# Altium PCB PCB1.PcbDoc (part 3 of 4)
Units mm, origin at the board's own origin, x right, y up, seen from the top; angles counter-clockwise.
Board outline 100.03 x 99.98 mm, 4 copper layers (Top Layer, Layer 2, Layer 3, Bottom Layer), stack 0.603 mm thick; 139 components, 135 nets, 1369 pads, 401 vias.
Unrouted connection lines stored in the file: 1.
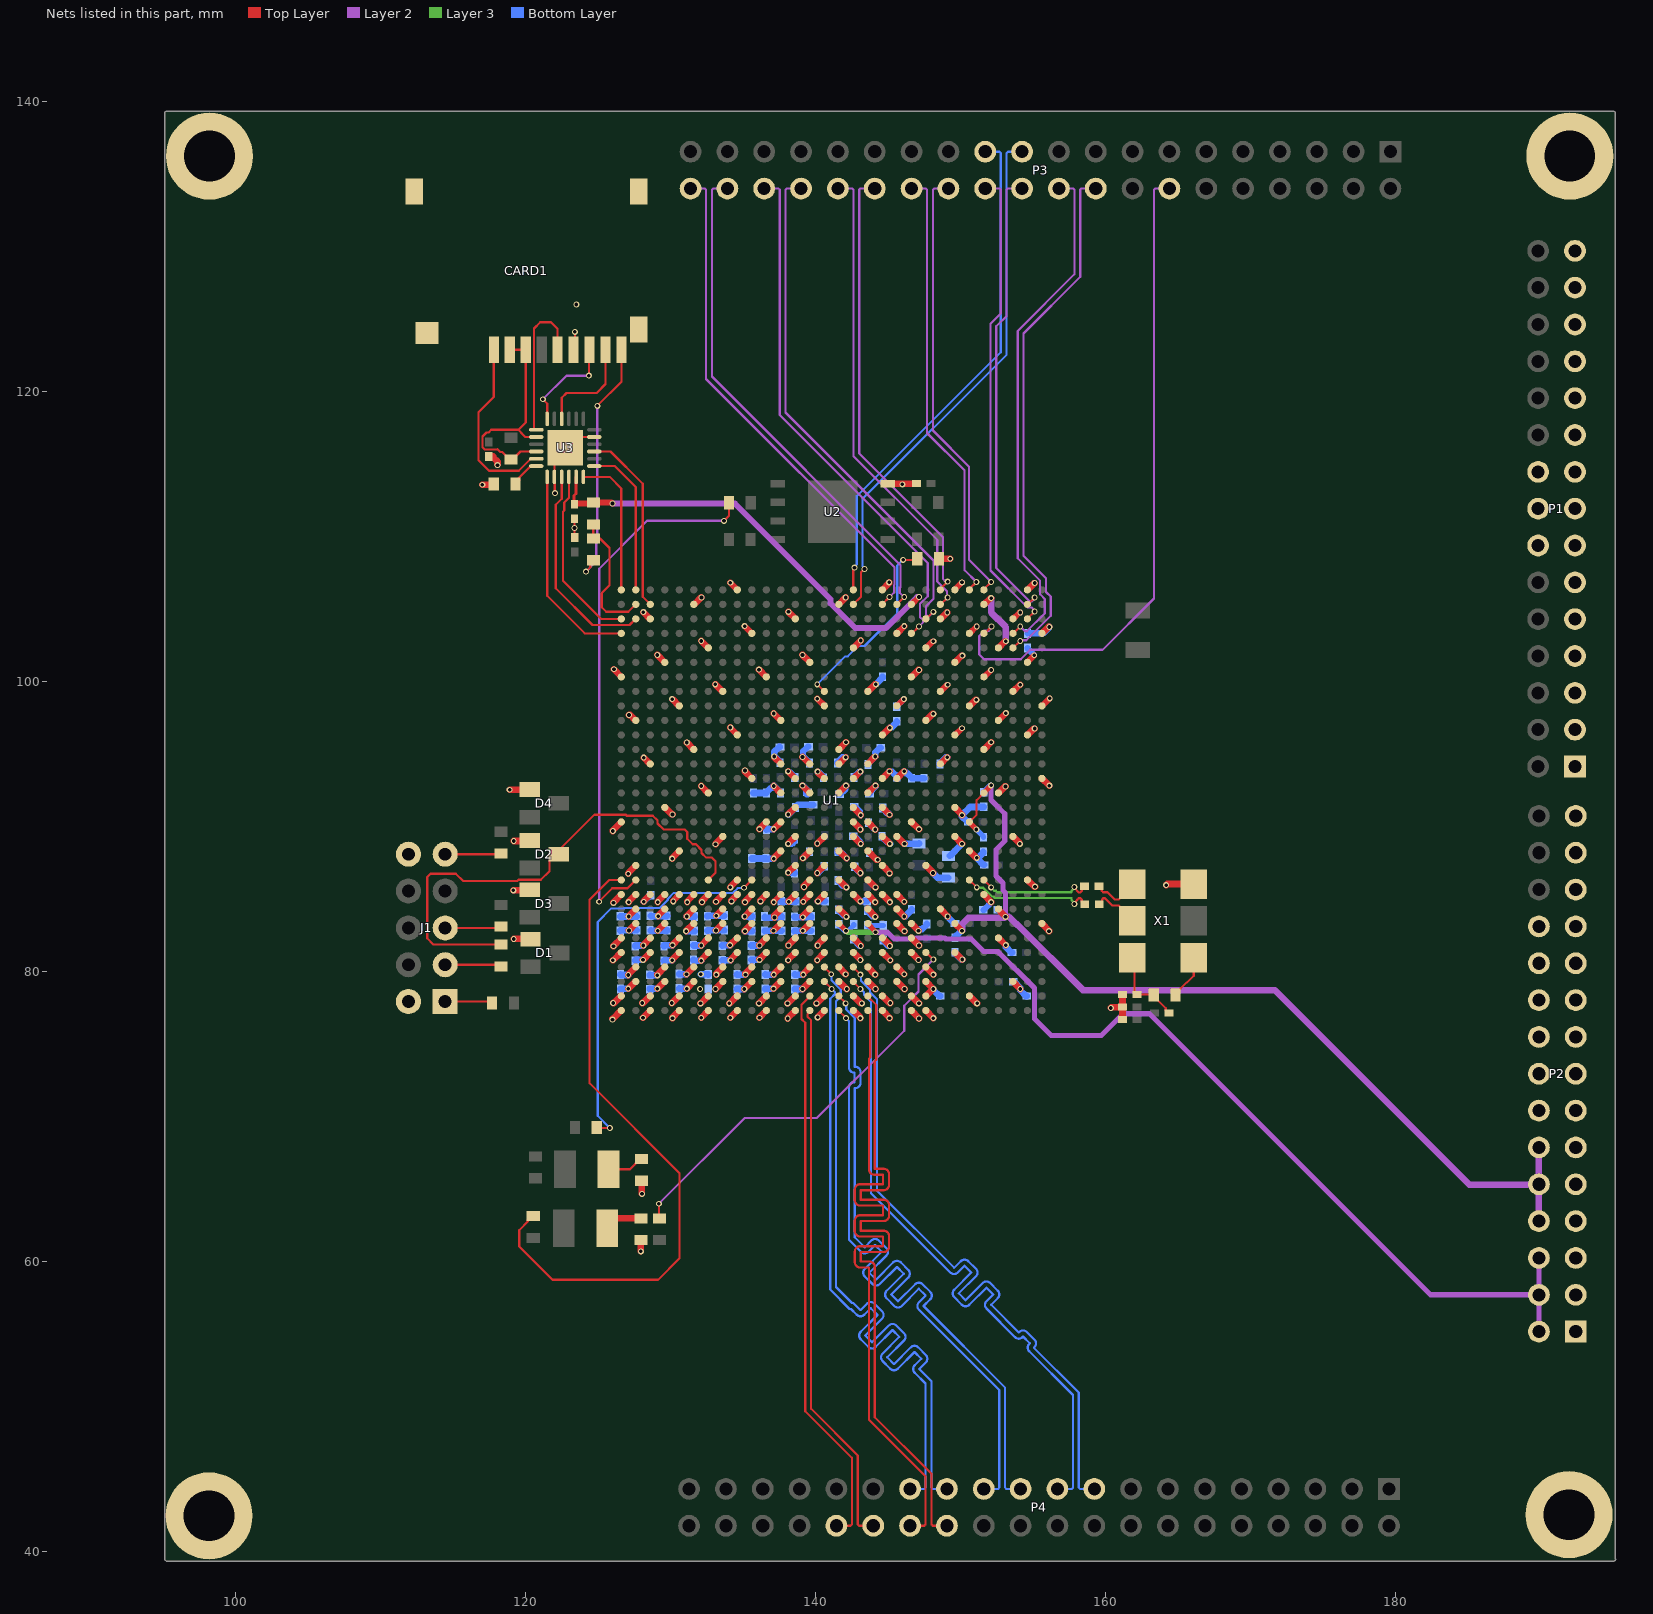
[diagram p5: the nets of this part, all layers, seen from the top]

## Via types
v1: diameter 0.406, hole 0.254, Top Layer to Bottom Layer, 401 vias

## Nets (pads, with @x,y where several pads share a name; then routed paths per layer and width w, separated by ;. In a path a pad name is that pad's centre, name@x,y a point inside that pad or via, vN(x,y) a via of type N, cw(c..) or ccw(c..) an arc to the next point about the centre after c; other vN are vias at no path point) (continued)
GND: C1.2 C2.1 C3.1 C4.1 C5.1 C6.1 C7.1 C8.1 C9.1 C10.1 C11.1 C12.1 C13.2 C14.1 C15.1 C16.1 C17.1 C18.1 C19.1 C20.1 C21.1 C22.1 C23.1 C24.1 C25.1 C26.1 C27.1 C28.1 C29.1 C30.1 C31.1 C32.1 C33.1 C34.1 C35.1 C36.1 C37.1 C38.1 C39.1 C40.1 C41.1 C42.1 C43.1 C44.1 C45.1 C46.1 C47.1 C48.1 C49.1 C50.1 C51.1 C52.1 C53.1 C54.1 C55.1 C56.1 C57.1 C58.1 C59.1 C60.1 C61.1 C62.1 C63.1 C64.1 C65.1 C66.1 C67.1 C68.1 C69.1 C70.1 C71.1 C72.1 C73.1 C76.1 C80.1 C81.1 C82.1 C84.1 C85.1 C86.1 C87.1 C88.1 C89.1 C90.1 C91.1 C92.1 C93.1 C94.2 C95.2 C96.2 C97.1 C98.1 C99.1 CARD1.6 CARD1.10 CARD1.11 CARD1.12 CARD1.13 D1.1 D2.1 D3.1 D4.1 J1.2 J1.10 L1.1 P1.1 P1.2 P1.3 P1.4 P1.5 P1.6 P1.7 P1.8 P1.9 P1.10 P1.11 P1.12 P1.13 P1.14 P1.15 P2.1 P2.2 P2.3 P2.4 P2.5 P2.6 P2.7 P2.8 P2.9 P2.10 P2.11 P2.12 P2.13 P2.14 P2.15 pad.3 R5.1 R7.1 R15.1 R18.1 R19.1 U1.A1 U1.A2 U1.A5 U1.A6 U1.A9 U1.A14 U1.A24 U1.AA1 U1.AA2 U1.AA5 U1.AA6 U1.AA7 U1.AA14 U1.AA24 U1.AB1 U1.AB2 U1.AB3 U1.AB4 U1.AB11 U1.AB21 U1.AC8 U1.AC18 U1.AC28 U1.AD5 U1.AD15 U1.AD25 U1.AE2 U1.AE12 U1.AE22 U1.AF9 U1.AF19 U1.AF29 U1.AG6 U1.AG16 U1.AG26 U1.AH3 U1.AH13 U1.AH23 U1.AJ10 U1.AJ20 U1.AJ30 U1.AK7 U1.AK17 U1.AK27 U1.B4 U1.B8 U1.B9 U1.B11 U1.B21 U1.C1 U1.C2 U1.C6 U1.C9 U1.C18 U1.C28 U1.D4 U1.D8 U1.D9 U1.D15 U1.D25 U1.E1 U1.E2 U1.E6 U1.E9 U1.E12 U1.E22 U1.F4 U1.F8 U1.F9 U1.F19 U1.F29 U1.G1 U1.G2 U1.G6 U1.G9 U1.G16 U1.G26 U1.H4 U1.H8 U1.H9 U1.H13 U1.H23 U1.J1 U1.J2 U1.J6 U1.J9 U1.J10 U1.J20 U1.J30 U1.K4 U1.K8 U1.K9 U1.K17 U1.K27 U1.L1 U1.L2 U1.L6 U1.L9 U1.L14 U1.L24 U1.M4 U1.M8 U1.M9 U1.M12 U1.M14 U1.M16 U1.M18 U1.M21 U1.N1 U1.N2 U1.N6 U1.N9 U1.N11 U1.N13 U1.N15 U1.N17 U1.N28 U1.P4 U1.P8 U1.P9 U1.P10 U1.P12 U1.P16 U1.P18 U1.P25 U1.R1 U1.R2 U1.R6 U1.R9 U1.R11 U1.R13 U1.R17 U1.R22 U1.T4 U1.T8 U1.T10 U1.T12 U1.T16 U1.T18 U1.T19 U1.T29 U1.U1 U1.U2 U1.U6 U1.U9 U1.U11 U1.U13 U1.U14 U1.U15 U1.U17 U1.U26 U1.V4 U1.V8 U1.V9 U1.V10 U1.V12 U1.V14 U1.V16 U1.V18 U1.V23 U1.W1 U1.W2 U1.W6 U1.W9 U1.W11 U1.W13 U1.W15 U1.W17 U1.W20 U1.W30 U1.Y3 U1.Y4 U1.Y7 U1.Y8 U1.Y9 U1.Y17 U1.Y27 U2.4 U3.2 U3.11 U3.25 X1.3 | length 217.3
  Top Layer w0.152: CARD1.10@112.928,124.325 CARD1.10@113.231,124.023 CARD1.10@113.281,124.023 ; v1(122.047,112.979) 122.027,112.999 122.027,114.085 U3.2@122.008,114.103 122.008,115.353 U3.25@122.758,116.103 123.508,116.853 U3.11@124.758,116.853 ; CARD1.6@123.331,122.872 123.419,122.96 v1(123.419,124.104) ; C92.1@123.393,111.209 123.393,109.949 C94.2@123.419,109.923 ; CARD1.11@127.831,124.273 CARD1.11@127.831,124.573 ; U1.F29@131.608,105.314 U1.F29@131.62,105.314 U1.F29@131.645,105.314 ; v1@132.122,105.791 v1(132.148,105.791)
  Top Layer w0.356: v1@137.135,84.817 U1.M9@137.62,85.302
  Top Layer w0.457: v1(117.043,113.563) 117.778,113.563 R19.1@117.824,113.609 ; 117.78,115.51 117.78,115.46 118.085,115.155 v1@118.085,114.935 ; v1(118.923,92.532) 120.3,92.532 D4.1@120.31,92.542 ; v1(119.177,85.598) 120.274,85.598 D3.1@120.31,85.634 ; v1(119.202,82.245) 120.345,82.245 D1.1@120.361,82.23 ; v1(119.202,89.002) 120.274,89.002 D2.1@120.31,89.037 ; v1@125.984,76.733 126.028,76.733 126.608,77.314 U1.A1@126.62,77.314 ; v1(126.035,80.772) 126.067,80.772 126.608,81.314 U1.A5@126.62,81.314 ; v1(126.035,89.687) 126.035,89.717 126.62,90.302 U1.A14@126.62,90.314 ; v1(126.06,77.826) 126.12,77.826 126.608,78.314 U1.A2@126.62,78.314 ; v1(126.086,81.74) 126.086,81.768 U1.A6@126.613,82.296 ; v1(126.086,84.734) 126.086,84.768 126.62,85.302 U1.A9@126.62,85.314 ; v1(126.111,100.838) 126.111,100.835 126.62,100.326 U1.A24@126.62,100.314 ; U1.A6@126.613,82.327 U1.A6@126.613,82.296 ; U1.A6@126.62,82.314 126.62,82.302 U1.A6@126.613,82.296 ; v1(127.102,79.756) 127.102,79.784 127.62,80.302 U1.B4@127.62,80.314 ; v1(127.102,86.741) 127.102,86.784 127.62,87.302 U1.B11@127.62,87.314 ; v1(127.127,83.795) 127.127,83.809 127.62,84.302 U1.B8@127.62,84.314 ; v1(127.127,84.785) 127.127,84.809 127.62,85.302 U1.B9@127.62,85.314 ; v1(127.152,97.688) 127.234,97.688 127.608,97.314 U1.B21@127.62,97.314 ; v1(127.965,60.706) 127.965,61.455 R7.1@127.991,61.48 ; R5.1@128.016,65.569 128.041,65.544 v1(128.041,64.668) ; v1(128.067,77.826) 128.12,77.826 128.608,78.314 U1.C2@128.62,78.314 ; v1(128.118,76.81) U1.C1@128.62,77.314 U1.C1@128.62,77.314 ; v1(128.143,81.791) 128.143,81.825 128.62,82.302 U1.C6@128.62,82.314 ; v1(128.143,104.775) 128.147,104.775 128.608,104.314 U1.C28@128.62,104.314 ; v1(128.168,84.811) 128.168,84.851 128.62,85.302 U1.C9@128.62,85.314 ; v1(128.168,94.742) 128.18,94.742 128.608,94.314 U1.C18@128.62,94.314 ; v1(129.108,79.731) 129.108,79.79 129.62,80.302 U1.D4@129.62,80.314 ; v1(129.108,101.829) 129.62,101.317 U1.D25@129.62,101.314 ; v1(129.134,84.785) 129.134,84.816 129.62,85.302 U1.D9@129.62,85.314 ; v1(129.159,83.82) 129.159,83.841 129.62,84.302 U1.D8@129.62,84.314 ; U1.D15@129.62,91.314 129.632,91.314 130.115,90.83 v1(130.15,90.83) ; v1(130.099,77.826) 130.12,77.826 130.608,78.314 U1.E2@130.62,78.314 ; v1(130.124,87.782) 130.124,87.806 130.62,88.302 U1.E12@130.62,88.314 ; v1(130.124,98.781) 130.142,98.781 130.608,98.314 U1.E22@130.62,98.314 ; v1(130.15,76.784) 130.15,76.832 130.62,77.302 U1.E1@130.62,77.314 ; v1(130.15,81.816) 130.15,81.832 130.62,82.302 U1.E6@130.62,82.314 ; v1(130.2,84.836) 130.2,84.883 130.62,85.302 U1.E9@130.62,85.314 ; v1(131.115,79.807) 131.62,80.312 U1.F4@131.62,80.314 ; v1(131.14,83.795) 131.14,83.822 131.62,84.302 U1.F8@131.62,84.314 ; v1(131.14,95.783) 131.61,95.314 U1.F19@131.62,95.314 ; v1(131.166,84.785) 131.166,84.848 U1.F9@131.62,85.302 ; U1.F9@131.608,85.314 U1.F9@131.62,85.302 ; U1.F9@131.62,85.314 U1.F9@131.62,85.302 ; U1.F29@131.645,105.314 v1@132.122,105.791 ; v1(132.08,77.8) 132.095,77.8 132.608,78.314 U1.G2@132.62,78.314 ; v1(132.131,76.81) 132.131,76.813 132.62,77.302 U1.G1@132.62,77.314 ; v1(132.131,81.791) 132.131,81.813 132.62,82.302 U1.G6@132.62,82.314 ; v1(132.131,92.786) 132.136,92.786 132.608,92.314 U1.G16@132.62,92.314 ; v1(132.131,102.794) 132.611,102.314 U1.G26@132.62,102.314 ; v1(132.182,84.785) 132.182,84.864 132.62,85.302 U1.G9@132.62,85.314 ; v1(133.096,99.797) 133.126,99.797 133.608,99.314 U1.H23@133.62,99.314 ; v1(133.121,88.773) 133.121,88.804 133.62,89.302 U1.H13@133.62,89.314 ; v1(133.147,84.811) 133.147,84.829 133.62,85.302 U1.H9@133.62,85.314 ; v1(133.172,79.781) 133.172,79.854 133.62,80.302 U1.H4@133.62,80.314 ; v1(133.172,83.845) 133.172,83.854 133.62,84.302 U1.H8@133.62,84.314 ; v1(134.061,77.8) 134.095,77.8 134.608,78.314 U1.J2@134.62,78.314 ; v1(134.112,81.816) 134.61,82.314 U1.J6@134.62,82.314 ; v1(134.137,76.81) 134.137,76.82 134.62,77.302 U1.J1@134.62,77.314 ; v1(134.137,85.801) 134.137,85.82 134.62,86.302 U1.J10@134.62,86.314 ; v1(134.137,96.825) 134.137,96.808 134.62,96.326 U1.J20@134.62,96.314 ; v1(134.137,106.807) 134.62,106.324 U1.J30@134.62,106.314 ; v1(134.214,84.836) 134.214,84.896 134.62,85.302 U1.J9@134.62,85.314 ; v1(135.128,83.795) 135.128,83.81 135.62,84.302 U1.K8@135.62,84.314 ; v1(135.128,103.81) 135.62,103.318 U1.K27@135.62,103.314 ; v1(135.153,84.785) 135.153,84.836 135.62,85.302 U1.K9@135.62,85.314 ; v1(135.153,93.853) 135.153,93.792 135.62,93.326 U1.K17@135.62,93.314 ; v1(135.179,79.781) 135.179,79.861 135.62,80.302 U1.K4@135.62,80.314 ; v1(136.119,77.8) 136.62,78.302 U1.L2@136.62,78.314 ; v1(136.119,100.813) 136.617,100.314 U1.L24@136.62,100.314 ; v1(136.144,76.81) 136.144,76.826 136.62,77.302 U1.L1@136.62,77.314 ; v1(136.144,81.791) 136.144,81.826 136.62,82.302 U1.L6@136.62,82.314 ; v1(136.144,89.814) 136.144,89.826 136.62,90.302 U1.L14@136.62,90.314 ; v1(136.22,84.836) 136.22,84.902 136.62,85.302 U1.L9@136.62,85.314 ; v1(137.135,79.781) 137.135,79.817 137.62,80.302 U1.M4@137.62,80.314 ; v1(137.135,84.785) v1@137.135,84.817 ; v1(137.135,87.782) 137.135,87.817 137.62,88.302 U1.M12@137.62,88.314 ; v1(137.135,89.814) 137.135,89.817 137.62,90.302 U1.M14@137.62,90.314 ; v1(137.135,92.786) 137.136,92.786 137.608,92.314 U1.M16@137.62,92.314 ; v1(137.135,97.79) 137.611,97.314 U1.M21@137.62,97.314 ; v1(137.16,94.818) 137.16,94.786 137.62,94.326 U1.M18@137.62,94.314 ; v1(137.185,83.718) 137.185,83.868 137.62,84.302 U1.M8@137.62,84.314 ; U1.M9@137.62,85.302 U1.M9@137.62,85.314 ; v1(138.074,77.8) 138.095,77.8 138.608,78.314 U1.N2@138.62,78.314 ; v1(138.1,76.759) 138.1,76.782 138.62,77.302 U1.N1@138.62,77.314 U1.N1@138.608,77.314 ; v1(138.125,86.817) 138.62,87.312 U1.N11@138.62,87.314 ; v1(138.125,88.798) 138.125,88.807 138.62,89.302 U1.N13@138.62,89.314 ; v1(138.125,90.83) 138.609,91.314 U1.N15@138.62,91.314 ; v1(138.125,93.802) 138.613,93.314 U1.N17@138.62,93.314 ; v1(138.151,81.791) 138.151,81.833 138.62,82.302 U1.N6@138.62,82.314 ; v1(138.151,104.8) 138.151,104.795 138.62,104.326 U1.N28@138.62,104.314 ; v1(138.176,84.811) 138.176,84.858 138.62,85.302 U1.N9@138.62,85.314 ; v1(139.116,92.812) 139.613,92.314 U1.P16@139.62,92.314 ; v1(139.116,94.793) 139.13,94.793 139.608,94.314 U1.P18@139.62,94.314 ; v1(139.116,101.829) 139.62,101.324 U1.P25@139.62,101.314 ; v1(139.141,83.744) 139.141,83.823 139.62,84.302 U1.P8@139.62,84.314 ; v1(139.141,87.808) 139.141,87.823 139.62,88.302 U1.P12@139.62,88.314 ; v1(139.167,79.781) 139.167,79.849 139.62,80.302 U1.P4@139.62,80.314 ; v1(139.167,84.811) 139.167,84.849 139.62,85.302 U1.P9@139.62,85.314 ; v1(139.217,85.827) 139.217,85.9 139.62,86.302 U1.P10@139.62,86.314 ; v1(140.081,77.8) 140.095,77.8 140.609,78.314 U1.R2@140.62,78.314 ; v1(140.132,86.792) 140.132,86.814 140.62,87.302 U1.R11@140.62,87.314 ; v1(140.132,88.824) 140.62,89.312 U1.R13@140.62,89.314 ; v1(140.132,98.806) 140.62,98.318 U1.R22@140.62,98.314 ; v1(140.157,76.835) 140.157,76.839 140.62,77.302 U1.R1@140.62,77.314 ; v1(140.157,81.791) 140.157,81.839 140.62,82.302 U1.R6@140.62,82.314 ; v1(140.157,93.777) 140.157,93.765 140.609,93.314 U1.R17@140.62,93.314 ; v1(140.183,84.836) 140.183,84.865 140.62,85.302 U1.R9@140.62,85.314 ; U1.T4@141.62,80.314 141.62,80.302 142.088,79.835 v1(142.088,79.807) ; U1.T8@141.62,84.314 141.62,84.302 142.138,83.784 v1(142.138,83.769) ; U1.T10@141.62,86.314 141.626,86.314 v1(142.138,85.801) ; U1.T12@141.62,88.314 141.632,88.314 142.138,87.808 v1(142.164,87.808) ; U1.T16@141.62,92.314 141.62,92.319 v1(142.113,92.812) ; U1.T18@141.62,94.314 141.632,94.314 142.085,94.767 v1(142.088,94.767) ; U1.T19@141.62,95.314 141.62,95.316 v1(142.113,95.809) ; U1.T29@141.62,105.314 141.62,105.324 v1(142.088,105.791) ; U1.U1@142.62,77.314 142.62,77.302 143.104,76.819 v1(143.104,76.784) ; U1.U2@142.62,78.314 142.632,78.314 143.145,77.8 v1(143.205,77.8) ; U1.U6@142.62,82.314 142.62,82.302 143.129,81.793 v1(143.129,81.763) ; U1.U9@142.62,85.314 142.626,85.314 v1(143.104,84.836) ; U1.U11@142.62,87.314 142.62,87.302 143.104,86.819 v1(143.104,86.792) ; U1.U13@142.62,89.314 142.62,89.307 v1(143.129,88.798) ; U1.U14@142.62,90.314 142.62,90.302 143.104,89.819 v1(143.104,89.789) ; U1.U15@142.62,91.314 142.62,91.302 143.129,90.794 v1(143.129,90.78) ; U1.U17@142.62,93.314 142.632,93.314 143.095,93.777 v1(143.104,93.777) ; U1.U26@142.62,102.314 142.624,102.314 v1(143.129,102.819) ; U1.V4@143.62,80.314 143.62,80.302 144.12,79.803 v1(144.12,79.781) ; U1.V8@143.62,84.314 143.62,84.302 144.12,83.803 v1(144.12,83.769) ; U1.V9@143.62,85.314 143.62,85.302 144.12,84.803 v1(144.12,84.785) ; U1.V10@143.62,86.314 143.632,86.314 v1(144.145,85.801) ; U1.V12@143.62,88.314 143.62,88.302 144.216,87.706 v1(144.297,87.706) ; U1.V14@143.62,90.314 143.62,90.302 144.12,89.803 v1(144.12,89.789) ; U1.V16@143.62,92.314 143.632,92.314 144.129,92.812 v1(144.145,92.812) ; U1.V18@143.62,94.314 143.62,94.319 v1(144.12,94.818) ; U1.V23@143.62,99.314 143.632,99.314 144.114,99.797 v1(144.17,99.797) ; U1.W1@144.62,77.314 144.62,77.302 145.11,76.812 v1(145.11,76.784) ; U1.W2@144.62,78.314 144.632,78.314 145.12,77.826 v1(145.161,77.826) ; U1.W6@144.62,82.314 144.62,82.302 145.136,81.787 v1(145.136,81.763) ; U1.W9@144.62,85.314 144.62,85.302 145.136,84.787 v1(145.136,84.785) ; U1.W11@144.62,87.314 144.62,87.302 145.11,86.812 v1(145.11,86.766) ; U1.W13@144.62,89.314 v1(145.136,88.798) ; U1.W15@144.62,91.314 144.62,91.302 145.11,90.812 v1(145.11,90.805) ; U1.W17@144.62,93.314 144.622,93.314 v1(145.11,93.802) ; U1.W20@144.62,96.314 144.632,96.314 145.117,96.799 v1(145.136,96.799) ; U1.W30@144.62,106.314 144.62,106.326 145.085,106.79 v1(145.085,106.832) ; U2.4@144.999,113.629 145.004,113.634 146.967,113.634 C76.1@146.972,113.64 ; U1.Y3@145.613,79.295 145.62,79.303 U1.Y3@145.62,79.314 145.629,79.314 v1(146.152,78.791) ; U1.Y4@145.62,80.313 v1(146.126,79.807) ; U1.Y7@145.62,83.314 145.62,83.31 v1(146.152,82.779) ; U1.Y8@145.62,84.314 145.62,84.302 146.126,83.796 v1(146.126,83.795) ; U1.Y9@145.62,85.314 145.623,85.314 v1(146.126,84.811) ; U1.Y17@145.62,93.314 145.632,93.314 146.12,93.802 v1(146.126,93.802) ; U1.Y27@145.62,103.314 145.63,103.314 v1(146.126,103.81) ; U1.AA1@146.62,77.314 146.62,77.302 147.142,76.78 v1(147.142,76.759) ; U1.AA2@146.62,78.314 146.629,78.314 v1(147.142,77.8) ; U1.AA5@146.62,81.314 146.62,81.302 147.117,80.806 v1(147.117,80.797) ; U1.AA6@146.62,82.314 146.62,82.31 v1(147.142,81.788) ; U1.AA7@146.62,83.314 146.62,83.302 147.117,82.806 v1(147.117,82.804) ; U1.AA14@146.62,90.314 146.632,90.314 147.131,89.814 v1(147.142,89.814) ; U1.AA24@146.62,100.314 146.632,100.314 147.105,100.787 v1(147.142,100.787) ; U1.AB1@147.62,77.314 147.62,77.302 148.133,76.79 v1(148.133,76.784) ; U1.AB2@147.62,78.314 147.632,78.314 148.109,78.791 v1(148.133,78.791) 147.62,79.303 U1.AB3@147.62,79.314 ; U1.AB4@147.62,80.314 147.628,80.306 147.628,80.294 148.133,79.79 v1(148.133,79.781) ; U1.AB11@147.62,87.314 147.62,87.302 148.107,86.815 v1(148.107,86.792) ; U1.AB21@147.62,97.314 147.632,97.314 148.082,97.765 v1(148.133,97.765) ; R15.1@148.527,108.458 v1(149.301,108.458) ; U1.AC8@148.62,84.314 148.62,84.302 149.123,83.799 v1(149.123,83.795) ; U1.AC18@148.62,94.314 148.632,94.314 149.085,94.767 v1(149.098,94.767) ; U1.AC28@148.62,104.314 148.632,104.314 149.067,104.75 v1(149.098,104.75) ; U1.AD5@149.62,81.314 149.632,81.314 150.123,80.823 v1(150.139,80.823) ; U1.AD15@149.62,91.314 149.62,91.302 150.114,90.809 v1(150.114,90.78) ; U1.AD25@149.62,101.314 149.632,101.314 150.096,101.778 v1(150.139,101.778) ; U1.AE2@150.62,78.314 150.632,78.314 151.145,77.8 v1(151.155,77.8) ; U1.AE12@150.62,88.314 150.632,88.314 151.112,87.833 v1(151.13,87.833) ; U1.AE22@150.62,98.314 150.632,98.314 151.048,98.73 v1(151.105,98.73) ; U1.AF9@151.62,85.314 151.62,85.302 152.121,84.802 v1(152.121,84.785) ; U1.AF19@151.62,95.314 151.626,95.314 v1(152.121,95.809) ; U1.AF29@151.62,105.314 151.632,105.314 152.058,105.74 v1(152.121,105.74) ; U1.AG6@152.62,82.314 152.632,82.314 153.132,81.813 v1(153.137,81.813) ; U1.AG16@152.62,92.314 152.632,92.314 153.079,92.761 v1(153.111,92.761) ; U1.AG26@152.62,102.314 152.632,102.314 153.086,102.768 v1(153.137,102.768) ; U1.AH3@153.62,79.314 153.62,79.302 154.127,78.795 v1(154.127,78.791) ; U1.AH13@153.62,89.314 153.62,89.302 154.102,88.821 v1(154.102,88.798) ; U1.AH23@153.62,99.314 153.632,99.314 154.089,99.771 v1(154.127,99.771) ; U1.AJ10@154.62,86.314 154.632,86.314 155.094,85.852 v1(155.143,85.852) ; U1.AJ20@154.62,96.314 154.632,96.314 155.066,96.749 v1(155.118,96.749) ; U1.AJ30@154.62,106.314 154.632,106.314 155.099,106.782 v1(155.118,106.782) ; U1.AK7@155.62,83.314 155.62,83.302 156.108,82.814 v1(156.108,82.779) ; U1.AK17@155.62,93.314 155.631,93.314 v1(156.134,92.812) ; U1.AK27@155.62,103.314 155.632,103.314 156.077,103.759 v1(156.134,103.759) ; v1(160.376,77.488) 160.412,77.525 161.158,77.525 C81.1@161.179,77.546 ; C82.1@161.179,76.683 C81.1@161.179,77.546 ; C80.1@161.179,78.41 C81.1@161.179,77.546 ; v1(164.186,85.954) 164.262,86.03 X1.3@166.091,86.03
  Layer 2 w0.457: v1(152.121,105.74) 152.121,104.762 153.137,103.746 v1(153.137,102.768)
  Bottom Layer w0.356: C28.1@143.739,88.206 143.739,88.156 144.179,87.716 144.288,87.716 v1(144.297,87.706)
  Bottom Layer w0.406: v1(138.125,93.802) 138.154,93.774 138.237,93.774 138.582,93.428 C37.1@138.582,93.378 ; v1(139.116,94.793) 139.162,94.839 139.162,95.194 139.472,95.504 C62.1@139.522,95.504 ; v1@139.137,94.793 139.226,94.793 139.598,94.42 C36.1@139.598,94.37 ; v1(140.132,86.792) 140.207,86.792 140.614,87.199 C54.1@140.614,87.249 ; C26.1@143.662,90.256 143.662,90.206 144.008,89.86 144.048,89.86 v1(144.12,89.789) ; C95.2@151.578,84.252 151.628,84.252 151.973,84.597 151.973,84.638 v1(152.121,84.785)
  Bottom Layer w0.457: C9.1@126.543,83.804 126.552,83.795 v1(127.127,83.795) C12.1@127.686,83.795 ; C21.1@126.568,79.791 126.568,79.777 126.59,79.756 v1(127.102,79.756) ; C17.1@127.584,81.747 127.584,81.769 127.606,81.791 v1(128.143,81.791) ; v1(128.168,84.811) C25.1@128.626,85.268 ; C24.1@128.575,79.781 128.575,79.752 128.596,79.731 v1(129.108,79.731) ; C2.1@128.651,83.845 128.651,83.841 128.672,83.82 v1(129.159,83.82) 129.751,83.82 C11.1@129.769,83.837 ; C16.1@129.565,81.747 129.565,81.795 129.587,81.816 v1(130.15,81.816) ; C23.1@130.607,79.827 130.627,79.807 v1(131.115,79.807) ; v1(131.14,83.795) 131.666,83.795 C8.1@131.674,83.787 ; C15.1@131.597,81.797 131.604,81.791 v1(132.131,81.791) ; v1(132.105,79.807) 132.597,79.807 C19.1@132.613,79.791 ; C5.1@132.563,83.812 132.563,83.824 132.584,83.845 v1(133.172,83.845) 133.722,83.845 C7.1@133.731,83.855 ; C14.1@133.579,81.772 133.579,81.795 133.6,81.816 v1(134.112,81.816) ; C20.1@134.595,79.791 134.604,79.781 v1(135.179,79.781) ; v1(135.128,83.795) 135.644,83.795 C4.1@135.661,83.812 ; C13.2@135.585,81.797 135.592,81.791 v1(136.144,81.791) ; C58.1@135.611,87.792 C33.1@136.601,87.792 136.611,87.782 v1(137.135,87.782) ; C63.1@135.738,92.304 C53.1@136.627,92.304 136.627,92.354 136.946,92.673 137.022,92.673 v1(137.135,92.786) 137.159,92.786 137.592,92.354 C41.1@137.592,92.304 ; C1.2@136.5,83.787 136.5,83.74 136.521,83.718 v1(137.185,83.718) 137.2,83.733 137.672,83.733 137.693,83.754 C10.1@137.693,83.804 ; C18.1@136.55,79.791 136.56,79.781 v1(137.135,79.781) ; C32.1@136.627,89.773 136.627,89.793 136.648,89.814 v1(137.135,89.814) ; C61.1@137.557,95.479 137.507,95.479 137.16,95.132 v1(137.16,94.818) 137.194,94.818 137.566,94.446 C38.1@137.566,94.396 ; C56.1@137.643,84.836 137.643,84.832 137.664,84.811 v1(138.176,84.811) 138.637,84.811 138.659,84.832 C48.1@138.659,84.844 ; v1(138.125,86.817) 138.561,86.817 138.582,86.796 C34.1@138.582,86.782 ; v1(138.125,88.798) 138.378,88.798 138.557,88.977 C64.1@138.557,89.111 ; v1@138.13,90.825 138.155,90.825 C68.1@138.633,91.304 138.633,91.354 138.775,91.495 139.856,91.495 L1.1@139.86,91.491 ; C6.1@138.557,83.779 138.557,83.765 138.578,83.744 v1(139.141,83.744) 139.704,83.744 139.725,83.765 C3.1@139.725,83.804 ; C22.1@138.582,79.791 138.592,79.781 v1(139.167,79.781) ; v1@139.163,87.838 139.212,87.887 139.229,87.887 C49.1@139.598,88.257 ; v1@139.213,92.74 139.391,92.563 139.391,92.249 139.412,92.227 C67.1@139.462,92.227 ; v1@140.179,93.731 140.244,93.731 140.564,93.411 C39.1@140.564,93.361 ; v1(140.183,84.836) C57.1@140.691,84.836 ; C35.1@141.529,94.378 141.529,94.428 141.868,94.767 v1(142.088,94.767) ; C55.1@141.554,88.249 141.554,88.199 141.576,88.178 141.794,88.178 v1(142.164,87.808) ; C72.1@141.58,86.276 141.58,86.226 141.899,85.906 142.034,85.906 v1(142.138,85.801) ; C47.1@141.605,84.261 141.605,84.211 141.925,83.891 142.016,83.891 v1(142.138,83.769) ; C66.1@141.672,92.227 141.722,92.227 142.042,92.547 142.042,92.74 v1(142.113,92.812) ; C30.1@142.621,89.332 142.671,89.332 143.082,88.921 v1@143.082,88.862 ; C44.1@142.646,82.236 142.646,82.186 143.07,81.763 v1(143.129,81.763) ; C40.1@142.672,93.37 142.672,93.42 142.992,93.74 143.067,93.74 v1(143.104,93.777) ; C31.1@142.688,91.364 142.738,91.364 143.058,91.044 143.058,90.851 v1(143.129,90.78) ; C50.1@142.723,87.232 142.723,87.182 143.104,86.801 v1(143.104,86.792) ; v1(143.104,84.836) C51.1@143.586,84.836 ; C46.1@143.612,84.185 143.612,84.135 143.931,83.815 144.074,83.815 v1(144.12,83.769) ; C42.1@143.637,94.277 143.637,94.327 144.12,94.809 v1(144.12,94.818) 144.131,94.829 144.131,95.108 144.451,95.428 C60.1@144.501,95.428 ; C65.1@143.729,92.253 143.729,92.352 v1@144.167,92.79 ; v1(144.17,99.797) 144.17,99.805 144.628,100.263 C69.1@144.628,100.313 ; C27.1@144.602,89.332 144.602,89.282 144.922,88.962 144.989,88.962 v1@145.144,88.807 ; C29.1@144.653,91.272 144.653,91.222 144.973,90.902 145.04,90.902 v1@145.123,90.818 ; C45.1@144.678,82.169 144.678,82.119 145.035,81.763 v1(145.136,81.763) ; v1(145.11,93.802) 145.147,93.766 145.298,93.766 145.618,93.446 C43.1@145.618,93.396 ; v1(145.136,96.799) 145.211,96.799 145.618,97.207 C71.1@145.618,97.257 ; v1(146.126,83.795) 146.186,83.795 146.634,84.243 C85.1@146.634,84.293 ; v1(146.126,93.802) 146.239,93.689 146.314,93.689 146.634,93.37 C52.1@146.634,93.32 146.638,93.324 147.494,93.324 C59.1@147.498,93.328 ; v1(147.117,82.804) 147.222,82.909 147.356,82.909 147.676,83.229 C73.1@147.676,83.279 ; v1(148.107,86.792) 148.426,86.474 R18.1@149.174,86.474 ; v1(148.133,78.791) 148.133,78.731 148.556,78.308 C99.1@148.606,78.308 ; C91.1@148.59,94.31 148.59,94.36 148.997,94.767 v1(149.098,94.767) ; v1(149.123,83.795) 149.123,83.761 149.572,83.312 C89.1@149.622,83.312 ; C96.2@149.631,81.321 149.631,81.271 150.08,80.823 v1(150.139,80.823) ; C86.1@150.536,90.322 150.486,90.322 150.114,90.695 v1(150.114,90.78) 150.677,91.342 151.591,91.342 C88.1@151.613,91.364 ; C87.1@151.587,88.256 151.587,88.206 151.215,87.833 v1(151.13,87.833) 151.13,87.825 151.604,87.351 C84.1@151.654,87.351 ; v1(153.137,81.813) 153.137,81.678 153.509,81.305 C97.1@153.559,81.305 ; C98.1@153.645,79.299 153.695,79.299 154.127,78.866 v1(154.127,78.791) 154.127,78.706 154.525,78.308 C90.1@154.575,78.308 ; C70.1@154.635,103.311 155.686,103.311 v1(156.134,103.759)
  other v1: 126.009,76.683 132.055,78.791 123.393,110.579 145.999,113.589 118.085,114.91 123.52,125.984
JTAG_TDO: D2.3 R2.1 U1.G10 | length 35.3
  Top Layer w0.152: R2.1@118.313,81.852 113.677,81.852 113.233,82.296 113.233,86.512 113.462,86.741 115.214,86.741 115.722,86.233 119.451,86.233 119.538,86.319 121.067,86.319 121.679,86.931 121.679,87.655 122.111,88.087 D2.3@122.301,88.087 ; D2.3@122.276,88.316 124.765,90.805 126.924,90.805 126.987,90.742 128.797,90.742 129.12,90.419 129.12,90.209 129.54,89.789 130.988,89.789 131.166,89.611 131.166,89.154 131.547,88.773 131.766,88.773 132.156,88.383 132.156,88.173 132.478,87.85 132.876,87.85 133.121,87.605 133.121,86.815 U1.G10@132.62,86.314
MGT_1.8V: C44.2 C45.2 C46.2 C47.2 P2.16 P2.17 P2.18 U1.T7 U1.V7 | length 70.6
  Top Layer w0.356: U1.T7@141.62,83.314 141.62,83.305 142.113,82.813 v1(142.113,82.804) ; U1.V7@143.62,83.314 143.62,83.275 144.135,82.76 144.135,82.712 v1(144.145,82.702)
  Layer 2 w0.356: v1(144.145,82.702) 144.977,82.702 145.435,82.245 146.917,82.245 146.973,82.301 148.94,82.301 148.996,82.245 150.749,82.245 151.613,81.382 152.578,81.382 155.105,78.854 155.105,76.746 156.261,75.59 159.715,75.59 161.214,77.089 163.043,77.089 182.423,57.709 P2.17@189.89,57.709 ; P2.16@189.89,55.169 P2.17@189.89,57.709 ; P2.18@189.89,60.249 P2.17@189.89,57.709
  Layer 3 w0.356: v1(142.113,82.804) 142.127,82.804 142.228,82.702 v1(144.145,82.702)
  Bottom Layer w0.356: C47.2@141.605,83.261 141.605,83.211 142.002,82.814 142.103,82.814 v1(142.113,82.804) 142.123,82.814 142.274,82.814 142.646,83.186 C44.2@142.646,83.236 ; v1(144.145,82.702) 144.135,82.712 144.034,82.712 143.612,83.135 C46.2@143.612,83.185 143.62,83.177 144.67,83.177 C45.2@144.678,83.169
MGTAVCC: C1.1 C2.2 C3.2 C4.2 C5.2 C6.2 C7.2 C8.2 C9.2 C10.2 C11.2 C12.2 P2.22 P2.23 P2.24 U1.B7 U1.D7 U1.F7 U1.H7 U1.K7 U1.M7 U1.P7 | length 12
  Top Layer w0.457: v1(127.152,82.832) 127.152,82.835 127.62,83.302 U1.B7@127.62,83.314 ; v1(129.134,82.807) 129.134,82.816 129.62,83.302 U1.D7@129.62,83.314 ; v1(131.089,82.781) 131.62,83.312 U1.F7@131.62,83.314 ; v1(133.147,82.832) 133.62,83.305 U1.H7@133.62,83.314 ; v1(135.153,82.781) 135.153,82.836 135.62,83.302 U1.K7@135.62,83.314 ; v1(137.109,82.807) 137.616,83.314 U1.M7@137.62,83.314 ; v1(139.141,82.807) 139.141,82.823 139.62,83.302 U1.P7@139.62,83.314
  Bottom Layer w0.457: C9.2@126.543,82.804 126.543,82.811 126.564,82.832 v1(127.152,82.832) C12.2@127.686,82.832 ; C2.2@128.651,82.845 128.651,82.828 128.672,82.807 v1(129.134,82.807) 129.747,82.807 129.769,82.828 C11.2@129.769,82.837 ; v1(131.089,82.781) 131.668,82.781 C8.2@131.674,82.787 ; C5.2@132.563,82.812 132.583,82.832 v1(133.147,82.832) 133.71,82.832 133.731,82.853 C7.2@133.731,82.855 ; v1(135.153,82.781) 135.64,82.781 135.661,82.803 C4.2@135.661,82.812 ; C1.1@136.5,82.787 136.52,82.807 v1(137.109,82.807) 137.691,82.807 C10.2@137.693,82.804 ; C6.2@138.557,82.779 138.557,82.785 138.578,82.807 v1(139.141,82.807) 139.723,82.807 C3.2@139.725,82.804
MGTAVTT: C13.1 C14.2 C15.2 C16.2 C17.2 C18.2 C19.2 C20.2 C21.2 C22.2 C23.2 C24.2 P2.25 P2.26 P2.27 U1.B3 U1.C5 U1.D3 U1.E5 U1.F3 U1.G5 U1.H3 U1.J5 U1.K3 U1.L5 U1.M3 U1.N5 U1.P3 U1.R5 U1.T3 U1.U5 U1.V3 U1.W5 | length 19.3
  Top Layer w0.457: v1(127.102,78.816) 127.111,78.816 127.608,79.314 U1.B3@127.62,79.314 ; v1(128.118,80.8) 128.62,81.302 U1.C5@128.62,81.314 ; v1(129.108,78.816) 129.111,78.816 129.608,79.314 U1.D3@129.62,79.314 ; v1(130.124,80.775) 130.124,80.806 130.62,81.302 U1.E5@130.62,81.314 ; v1(131.14,78.816) 131.14,78.822 131.62,79.302 U1.F3@131.62,79.314 ; v1(132.131,80.749) 132.131,80.813 132.62,81.302 U1.G5@132.62,81.314 ; v1(133.121,78.791) 133.121,78.804 133.62,79.302 U1.H3@133.62,79.314 ; v1(134.163,80.775) 134.163,80.845 134.62,81.302 U1.J5@134.62,81.314 ; v1(135.103,78.791) 135.62,79.308 U1.K3@135.62,79.314 ; v1(136.144,80.8) 136.144,80.826 136.62,81.302 U1.L5@136.62,81.314 ; v1(137.109,78.816) 137.111,78.816 137.608,79.314 U1.M3@137.62,79.314 ; v1(138.125,80.775) 138.125,80.807 138.62,81.302 U1.N5@138.62,81.314 ; v1(139.116,78.791) 139.116,78.798 139.62,79.302 U1.P3@139.62,79.314 ; v1(140.132,80.775) 140.132,80.814 140.62,81.302 U1.R5@140.62,81.314 ; U1.T3@141.62,79.314 141.632,79.314 142.155,78.791 v1(142.164,78.791) ; U1.U5@142.62,81.314 142.62,81.302 143.104,80.819 v1(143.104,80.797) ; U1.V3@143.62,79.314 143.622,79.314 v1(144.145,78.791) ; U1.W5@144.62,81.314 v1(145.161,80.772)
  Bottom Layer w0.457: C21.2@126.568,78.791 126.568,78.795 126.59,78.816 v1(127.102,78.816) ; C17.2@127.584,80.747 127.584,80.779 127.606,80.8 v1(128.118,80.8) ; C24.2@128.575,78.781 128.575,78.795 128.596,78.816 v1(129.108,78.816) ; C16.2@129.565,80.747 129.565,80.753 129.587,80.775 v1(130.124,80.775) ; C23.2@130.607,78.827 130.617,78.816 v1(131.14,78.816) ; C15.2@131.597,80.797 131.597,80.771 131.619,80.749 v1(132.131,80.749) ; C14.2@133.579,80.772 133.581,80.775 v1(134.163,80.775) ; C20.2@134.595,78.791 v1(135.103,78.791) ; C13.1@135.585,80.797 135.588,80.8 v1(136.144,80.8) ; C18.2@136.55,78.791 136.55,78.795 136.572,78.816 v1(137.109,78.816) ; C22.2@138.582,78.791 v1(139.116,78.791)
NetC80_2: C80.2 L3.1 R16.2 X1.6 | length 5.5
  Top Layer w0.152: X1.6@161.849,80.95 162.005,80.793 162.005,78.584 C80.2@162.179,78.41 163.309,78.41 R16.2@163.334,78.384 163.334,78.284 164.157,77.461 164.157,77.314 164.331,77.14 L3.1@164.381,77.14
NetCARD1_1: CARD1.1 U3.23 | length 12.7
  Top Layer w0.152: CARD1.1@117.831,122.872 117.831,119.607 116.764,118.54 116.764,115.265 117.5,114.529 119.558,114.529 120.383,115.353 U3.23@120.758,115.353 U3.23@120.746,115.341
NetCARD1_2: CARD1.2 CARD1.3 R22.2 U3.20 U3.22 | length 16
  Top Layer w0.152: CARD1.2@118.931,122.872 CARD1.3@120.03,122.872 120.03,117.848 119.53,117.348 ; R22.2@119.024,115.303 118.924,115.303 118.405,115.822 118.269,115.822 118.078,116.013 118.067,116.002 117.185,116.002 117.047,116.139 117.047,116.887 117.331,117.17 117.475,117.17 117.653,117.348 119.53,117.348 ; R22.2@119.124,115.303 119.675,115.853 U3.22@120.758,115.853 ; U3.20@120.758,116.853 120.002,116.853 119.722,117.133 119.722,117.157 119.53,117.348
  Top Layer w0.203: R22.2@119.024,115.303 R22.2@119.124,115.303
NetCARD1_5: CARD1.5 U3.19 | length 10.5
  Top Layer w0.152: U3.19@120.758,117.353 120.648,117.353 120.603,117.398 120.603,124.337 121.031,124.765 121.768,124.765 122.231,124.302 CARD1.5@122.231,122.872
NetCARD1_7: CARD1.7 U3.18 | length 7.1
  Top Layer w0.152: v1(121.209,119.456) 121.209,119.444 121.508,119.145 U3.18@121.508,118.103 ; v1(124.384,121.082) 124.384,122.826 CARD1.7@124.431,122.872
  Layer 2 w0.152: v1(121.209,119.456) 122.834,121.082 v1(124.384,121.082)
NetCARD1_8: CARD1.8 U3.16 | length 7.2
  Top Layer w0.152: U3.16@122.508,118.103 122.508,119.562 122.834,119.888 124.917,119.888 125.531,120.501 CARD1.8@125.531,122.872
NetCARD1_9: CARD1.9 R20.2 | length 17.3
  Top Layer w0.152: v1(124.181,107.569) 124.486,107.874 124.486,108.152 R20.2@124.689,108.355 ; v1(124.968,118.999) 126.631,120.662 CARD1.9@126.631,122.872
  Layer 2 w0.152: v1(124.181,107.569) 124.892,108.28 124.892,109.576 124.968,109.652 v1(124.968,118.999)
NetD5_2: D5.2 R5.2 | length 2.6
  Top Layer w0.152: D5.2@125.731,66.37 127.217,66.37 127.916,67.069 R5.2@128.016,67.069
NetD6_2: D6.2 R7.2 | length 2.7
  Top Layer w0.457: D6.2@125.655,62.306 125.655,62.459 126.177,62.98 R7.2@127.991,62.98
NetJ1_1: J1.1 R1.2 | length 3.3
  Top Layer w0.152: J1.1@114.478,77.927 117.614,77.927 R1.2@117.716,77.826
NetJ1_3: J1.3 R2.2 | length 3.9
  Top Layer w0.152: J1.3@114.478,80.467 118.198,80.467 R2.2@118.313,80.352
NetJ1_5: J1.5 R3.2 | length 3.9
  Top Layer w0.152: J1.5@114.478,83.007 118.225,83.007 R3.2@118.313,83.095
NetJ1_9: J1.9 R4.2 | length 3.9
  Top Layer w0.152: J1.9@114.478,88.087 118.288,88.087 R4.2@118.339,88.138
NetR8_2: R8.2 U1.AB5 | length 29.8
  Top Layer w0.152: v1(129.21,63.983) 129.21,62.829 129.361,62.98 R8.2@129.261,62.98 ; U1.AB5@147.62,81.314 147.642,81.314 v1(148.133,80.823)
  Layer 2 w0.152: v1(129.21,63.983) 135.128,69.901 140.106,69.901 146.126,75.921 146.126,77.648 147.105,78.627 147.105,79.795 v1(148.133,80.823)
NetR12_1: R12.1 U1.B10 | length 37.5
  Top Layer w0.152: v1(125.095,84.811) 125.095,84.836 126.001,85.742 127.048,85.742 U1.B10@127.62,86.314 ; v1(133.706,111.074) 134.048,111.416 R12.1@134.048,112.319
  Layer 2 w0.152: v1(125.095,84.811) 125.095,107.772 128.397,111.074 v1(133.706,111.074)
NetR13_1: R13.1 U1.K10 | length 27.3
  Top Layer w0.152: R13.1@124.931,69.24 124.956,69.215 v1(125.832,69.215) ; v1(135.077,85.776) 135.082,85.776 U1.K10@135.62,86.314
  Bottom Layer w0.152: v1(125.832,69.215) 124.993,70.053 124.993,83.419 125.928,84.353 126.807,84.353 126.832,84.379 129.266,84.379 129.819,84.932 129.819,84.994 130.246,85.42 134.316,85.42 134.645,85.749 135.051,85.749 v1(135.077,85.776)
NetR14_1: R14.1 U1.A10 | length 45.3
  Top Layer w0.152: R14.1@120.46,63.221 R14.1@120.548,63.132 120.448,63.132 120.175,62.859 120.175,62.759 119.583,62.167 119.583,61.036 121.869,58.75 129.159,58.75 130.632,60.223 130.632,66.091 124.435,72.288 124.435,84.963 125.785,86.314 U1.A10@126.62,86.314
NetR15_2: R15.2 U1.R23 | length 13.1
  Top Layer w0.152: v1(140.132,99.797) 140.138,99.797 U1.R23@140.62,99.314 ; v1(146.05,108.382) 146.951,108.382 R15.2@147.027,108.458
  Bottom Layer w0.152: v1(140.132,99.797) 142.062,101.727 142.24,101.727 142.951,102.438 143.383,102.438 145.644,104.699 145.644,108.001 v1@146.025,108.382
NetR16_1: R16.1 X1.1 | length 3.1
  Top Layer w0.152: R16.1@164.834,78.384 164.834,78.484 165.581,79.232 165.617,79.232 166.091,79.705 X1.1@166.091,80.95
NetR17_1: R17.1 U1.Y13 | length 1.7
  Top Layer w0.457: U1.Y13@145.62,89.314 145.632,89.314 146.147,88.798 v1(146.152,88.798)
  Bottom Layer w0.457: v1(146.152,88.798) 147.117,88.798 R17.1@147.142,88.824
NetR18_2: R18.2 U1.AD13 | length 2
  Top Layer w0.152: U1.AD13@149.62,89.292 U1.AD13@149.62,89.314
  Top Layer w0.457: U1.AD13@149.62,89.292 v1(150.114,88.798)
  Bottom Layer w0.152: R18.2@149.174,87.974 R18.2@149.274,87.974 ; v1@150.099,88.798 v1(150.114,88.798)
  Bottom Layer w0.457: R18.2@149.274,87.974 v1@150.099,88.798
NetR19_2: R19.2 U3.24 | length 2.5
  Top Layer w0.152: R19.2@119.597,113.882 R19.2@119.324,113.609 119.324,113.794 120.383,114.853 U3.24@120.758,114.853 U3.24@120.752,114.847
P1_N: P4.30 U1.P1 | length 38.1
  Top Layer w0.152: U1.P1@139.62,77.314 139.62,77.22 139.454,77.054 139.454,76.886 139.709,76.631 139.709,70.942 139.709,56.236 139.709,49.851 142.926,46.634 142.926,41.872 143.015,41.783 P4.30@143.993,41.783
P1_P: P4.32 U1.P2 | length 39.2
  Top Layer w0.152: U1.P2@139.62,78.271 139.048,77.699 139.048,76.718 139.303,76.463 139.303,70.942 139.303,56.236 139.303,49.683 142.519,46.466 142.519,41.872 142.43,41.783 P4.32@141.453,41.783
R3_N: P4.27 U1.R3 | length 48.3
  Top Layer w0.152: U1.R3@140.62,79.314 140.62,79.303 141.122,78.801 v1(141.122,78.791)
  Bottom Layer w0.152: v1(141.122,78.791) 141.132,78.791 141.348,78.575 141.348,78.448 141.021,78.121 141.021,58.074 142.359,56.736 142.451,56.736 142.853,56.334 ccw(c143.11,56.59) 143.367,56.334 143.816,56.783 144.283,56.316 143.128,55.161 ccw(c143.385,54.904) 143.128,54.647 143.656,54.119 ; 143.656,54.119 ccw(c143.913,54.376) 144.17,54.119 145.325,55.274 145.792,54.807 144.637,53.652 ccw(c144.894,53.395) 144.637,53.138 145.165,52.61 ccw(c145.422,52.867) 145.678,52.61 146.833,53.765 147.3,53.298 146.851,52.849 ccw(c147.108,52.592) 146.851,52.336 147.599,51.587 147.599,44.412 147.51,44.323 P4.27@146.533,44.323
R3_P: P4.25 U1.R4 | length 49.4
  Top Layer w0.152: U1.R4@140.62,80.314 140.62,80.299 141.097,79.822 v1(141.097,79.807)
  Bottom Layer w0.152: v1(141.097,79.807) 141.122,79.781 141.122,79.375 141.755,78.743 141.755,78.28 141.427,77.953 141.427,58.242 142.527,57.142 142.62,57.142 143.11,56.651 143.559,57.1 cw(c143.816,56.844) 144.073,57.1 144.601,56.572 cw(c144.344,56.316) 144.707,56.316 cw(c144.344,56.316) 144.601,56.059 143.446,54.904 143.913,54.437 145.068,55.592 cw(c145.325,55.335) 145.581,55.592 146.109,55.064 cw(c145.853,54.807) 146.216,54.807 cw(c145.853,54.807) 146.109,54.55 144.955,53.395 ; 144.955,53.395 145.422,52.928 146.576,54.083 cw(c146.833,53.826) 147.09,54.083 147.618,53.555 cw(c147.361,53.298) 147.725,53.298 cw(c147.361,53.298) 147.618,53.041 147.169,52.592 148.006,51.756 148.006,44.412 148.095,44.323 P4.25@149.073,44.323
SD_CD: R20.1 R21.2 U1.B29 | length 9.4
  Top Layer w0.152: R21.2@124.689,110.832 R20.1@124.689,109.855 125.146,109.855 125.806,109.195 125.806,106.629 125.273,106.096 125.273,105.105 125.578,104.8 127.106,104.8 U1.B29@127.62,105.314
SD_CLK: U1.C29 U3.9 | length 12.8
  Top Layer w0.152: U3.9@124.758,115.853 125.878,115.853 128.092,113.64 128.092,105.842 U1.C29@128.62,105.314
SD_CMD: U1.A28 U3.4 | length 12.4
  Top Layer w0.152: U3.4@123.008,114.103 123.008,112.67 122.682,112.344 122.682,111.785 122.606,111.709 122.606,106.934 125.226,104.314 U1.A28@126.62,104.314
SD_D0: U1.A30 U3.6 | length 9.9
  Top Layer w0.152: U3.6@124.008,114.103 125.825,114.103 126.62,113.308 U1.A30@126.62,106.314
SD_D1: U1.B30 U3.7 | length 10.6
  Top Layer w0.152: U3.7@124.758,114.853 126.167,114.853 127.62,113.401 U1.B30@127.62,106.314
SD_D2: U1.A27 U3.1 | length 14.4
  Top Layer w0.152: U3.1@121.508,114.103 121.508,105.898 124.092,103.314 U1.A27@126.62,103.314
SD_D3: U1.B28 U3.3 | length 14.6
  Top Layer w0.152: U3.3@122.508,114.103 122.508,112.602 122.098,112.192 122.098,106.426 124.638,103.886 127.192,103.886 U1.B28@127.62,104.314
SYS_CLK_N: C83.2 U1.AF10 | length 8
  Top Layer w0.152: U1.AF10@151.62,86.314 151.62,86.308 152.121,85.807 v1(152.121,85.801) ; v1(157.861,85.827) 157.861,85.758 158.06,85.559 158.06,85.544 158.149,85.455 158.275,85.455 158.364,85.544 158.364,85.704 158.538,85.877 C83.2@158.555,85.877
  Layer 3 w0.152: v1(152.121,85.801) 152.121,85.789 152.337,85.573 152.447,85.573 152.548,85.471 157.658,85.471 157.658,85.555 157.861,85.758 v1(157.861,85.827)
SYS_CLK_P: C79.2 U1.AE10 | length 9.2
  Top Layer w0.152: U1.AE10@150.62,86.314 150.62,86.312 151.13,85.803 v1(151.13,85.801) ; v1(157.861,84.658) 157.861,84.727 158.041,84.907 158.041,84.931 158.158,85.048 158.285,85.048 158.375,84.959 158.375,84.807 158.548,84.633 C79.2@158.572,84.633
  Layer 3 w0.152: v1(151.13,85.801) 151.158,85.773 151.562,85.773 152.169,85.166 152.278,85.166 152.38,85.065 157.658,85.065 157.658,84.93 157.861,84.727 v1(157.861,84.658)
T1_N: P4.23 U1.T1 | length 48.2
  Top Layer w0.152: U1.T1@141.62,77.314 141.62,77.295 142.113,76.803 v1(142.113,76.784)
  Bottom Layer w0.152: v1(142.113,76.784) 142.113,76.771 142.316,76.568 142.316,73.388 ccw(c142.679,73.388) 142.679,73.025 ; 142.679,72.365 ccw(c142.679,72.001) 142.316,72.001 142.316,61.503 143.144,60.675 ccw(c143.401,60.932) 143.657,60.675 144.119,61.137 144.586,60.67 143.406,59.49 ccw(c143.663,59.233) 143.406,58.976 143.934,58.448 ccw(c144.191,58.705) 144.448,58.448 145.628,59.628 146.095,59.161 144.915,57.981 ccw(c145.171,57.724) 144.915,57.468 145.443,56.94 ccw(c145.7,57.196) 145.956,56.94 147.136,58.12 147.603,57.653 147.142,57.191 ccw(c147.399,56.934) 147.142,56.677 152.679,51.14 152.679,44.412 152.59,44.323 P4.23@151.613,44.323 ; 142.702,72.365 142.702,73.025
T1_P: P4.21 U1.T2 | length 49.4
  Top Layer w0.152: U1.T2@141.62,78.314 141.62,78.291 142.088,77.823 v1(142.088,77.8)
  Bottom Layer w0.152: v1(142.088,77.8) 142.136,77.752 142.136,77.378 142.723,76.792 142.723,73.431 ; 142.723,71.958 142.723,61.671 143.401,60.993 143.862,61.455 cw(c144.119,61.198) 144.376,61.455 ; 142.745,71.958 ccw(c142.745,72.321) 143.108,72.321 143.108,73.068 ccw(c142.745,73.068) 142.745,73.431 ; 144.376,61.455 144.904,60.927 cw(c144.647,60.67) 145.01,60.67 cw(c144.647,60.67) 144.904,60.413 143.724,59.233 144.191,58.766 145.371,59.946 cw(c145.628,59.689) 145.885,59.946 146.413,59.418 cw(c146.156,59.161) 146.519,59.161 cw(c146.156,59.161) 146.413,58.904 145.233,57.724 145.7,57.257 146.88,58.437 cw(c147.136,58.181) 147.393,58.437 147.921,57.91 cw(c147.664,57.653) 148.028,57.653 cw(c147.664,57.653) 147.921,57.396 147.46,56.934 153.086,51.308 153.086,44.412 153.175,44.323 P4.21@154.153,44.323
U3_N: P4.19 U1.U3 | length 48.3
  Top Layer w0.152: U1.U3@142.62,79.314 142.62,79.294 143.104,78.811 v1(143.104,78.791)
  Bottom Layer w0.152: v1(143.104,78.791) 143.141,78.791 143.358,78.575 143.358,78.41 143.84,77.927 143.84,64.719 149.311,59.248 ccw(c149.568,59.505) 149.825,59.248 150.286,59.71 150.753,59.243 149.573,58.063 ccw(c149.83,57.806) 149.573,57.549 ; 149.574,57.549 150.101,57.021 ccw(c150.358,57.278) 150.615,57.021 151.795,58.201 152.262,57.734 151.801,57.273 ccw(c152.057,57.016) 151.801,56.759 153.769,54.79 ccw(c154.026,55.047) 154.283,54.79 154.32,54.828 154.787,54.361 154.75,54.324 ccw(c155.006,54.067) 154.75,53.81 157.759,50.8 157.759,44.412 157.67,44.323 P4.19@156.693,44.323
U3_P: P4.17 U1.U4 | length 49.4
  Top Layer w0.152: U1.U4@142.62,80.314 142.62,80.289 143.104,79.806 v1(143.104,79.781)
  Bottom Layer w0.152: v1(143.104,79.781) 143.152,79.733 143.152,79.355 143.429,79.078 143.764,78.743 143.764,78.578 144.247,78.096 144.247,64.888 149.568,59.566 150.03,60.028 cw(c150.286,59.771) 150.543,60.028 151.071,59.5 cw(c150.815,59.243) 151.178,59.243 cw(c150.815,59.243) 151.071,58.986 149.891,57.806 150.358,57.339 151.538,58.519 cw(c151.795,58.262) 152.052,58.519 152.58,57.991 cw(c152.323,57.734) 152.686,57.734 cw(c152.323,57.734) 152.58,57.477 152.118,57.016 154.026,55.108 154.064,55.146 cw(c154.32,54.889) 154.577,55.146 ; 154.578,55.146 155.105,54.618 cw(c154.849,54.361) 155.212,54.361 cw(c154.849,54.361) 155.105,54.105 155.067,54.067 158.166,50.968 158.166,44.412 158.255,44.323 P4.17@159.233,44.323
U30_N: P3.23 U1.U30 | length 35.5
  Top Layer w0.152: U1.U30@142.62,106.314 142.62,107.771 v1(142.697,107.848) v1@142.748,107.899
  Bottom Layer w0.152: v1(142.697,107.848) 142.697,107.913 142.849,108.065 142.849,112.766 152.781,122.698 152.781,136.436 152.692,136.525 P3.23@151.714,136.525
U30_P: P3.21 U1.U29 | length 36.7
  Top Layer w0.152: U1.U29@142.62,105.314 143.154,105.848 143.154,107.518 v1(143.383,107.747)
  Bottom Layer w0.152: v1(143.383,107.747) 143.383,107.816 143.255,107.943 143.255,112.598 153.187,122.53 153.187,136.436 153.277,136.525 P3.21@154.254,136.525
V1_N: P4.28 U1.V1 | length 48.8
  Top Layer w0.152: U1.V1@143.62,77.314 143.62,77.22 143.786,77.054 143.786,74.078 143.696,73.988 143.696,66.352 ccw(c144.059,66.352) 144.059,65.989 144.668,65.989 144.668,65.329 143.087,65.329 ccw(c143.087,64.966) 142.724,64.966 142.724,64.219 ccw(c143.087,64.219) 143.087,63.856 144.668,63.856 144.668,63.195 143.087,63.195 ccw(c143.087,62.832) 142.724,62.832 142.724,62.085 ccw(c143.087,62.085) 143.087,61.722 144.668,61.722 144.668,61.062 143.087,61.062 ccw(c143.087,60.698) 142.724,60.698 142.724,59.952 ccw(c143.087,59.952) 143.087,59.588 143.696,59.588 143.696,49.1 147.599,45.196 147.599,41.872 147.51,41.783 P4.28@146.533,41.783
V1_P: P4.26 U1.V2 | length 50
  Top Layer w0.152: U1.V2@143.62,78.314 143.62,78.271 144.192,77.699 144.192,73.91 144.102,73.82 144.102,66.396 144.711,66.396 cw(c144.711,66.032) 145.074,66.032 145.074,65.286 cw(c144.711,65.286) 144.711,64.922 143.13,64.922 143.13,64.262 144.711,64.262 cw(c144.711,63.899) 145.074,63.899 145.074,63.152 cw(c144.711,63.152) 144.711,62.789 143.13,62.789 143.13,62.128 144.711,62.128 cw(c144.711,61.765) 145.074,61.765 145.074,61.018 cw(c144.711,61.018) 144.711,60.655 143.13,60.655 143.13,59.995 143.739,59.995 cw(c143.739,59.632) 144.102,59.632 144.102,49.268 148.006,45.364 148.006,41.872 148.095,41.783 P4.26@149.073,41.783
VADJ: C70.2 C71.2 C92.2 P1.22 P1.23 P1.24 R21.1 U1.AA29 U1.AB26 U1.AC23 U1.AD20 U1.AD30 U1.AE27 U1.AF24 U1.AG21 U1.AH28 U1.AJ25 U1.AK22 U1.Y22 U3.5 | length 40.3
  Top Layer w0.152: U1.AJ25@154.62,101.314 U1.AJ25@154.62,101.323 ; v1@155.092,101.795 v1(155.092,101.803)
  Top Layer w0.203: C92.2@123.393,112.209 123.368,112.235 123.368,112.827 123.508,112.967 U3.5@123.508,114.103
  Top Layer w0.406: C92.2@123.393,112.209 123.393,112.224 123.44,112.271 124.627,112.271 R21.1@124.689,112.332 125.945,112.332 v1(126.009,112.268) ; U1.Y22@145.62,98.314 145.634,98.314 v1(146.101,98.781) ; U1.AA29@146.62,105.314 146.64,105.314 v1(147.142,105.816) ; U1.AB26@147.62,102.314 147.646,102.314 148.1,102.768 v1(148.133,102.768) ; U1.AC23@148.62,99.314 148.646,99.314 149.103,99.771 v1(149.123,99.771) ; U1.AD20@149.62,96.314 149.646,96.314 150.106,96.774 v1(150.114,96.774) ; U1.AD30@149.62,106.314 149.62,106.339 v1(150.114,106.832) ; U1.AE27@150.62,103.314 150.646,103.314 151.116,103.784 v1(151.13,103.784) ; U1.AF24@151.62,100.314 151.646,100.314 152.119,100.787 v1(152.121,100.787) ; U1.AG21@152.62,97.314 152.635,97.314 v1(153.137,97.815) ; U1.AH28@153.62,104.314 153.646,104.314 154.081,104.75 v1(154.127,104.75) ; U1.AJ25@154.62,101.323 v1@155.092,101.795 ; U1.AK22@155.62,98.314 155.642,98.314 v1(156.159,98.831)
  Layer 2 w0.406: v1(126.009,112.268) 134.449,112.268 141.05,105.668 141.05,105.381 142.748,103.683 144.882,103.683 147.015,105.816 v1(147.142,105.816)
  Bottom Layer w0.406: C71.2@145.618,98.257 145.618,98.307 146.092,98.781 v1(146.101,98.781) ; C70.2@154.635,102.311 154.635,102.261 v1(155.092,101.803)
VTTREF: C87.2 C88.2 C95.1 C96.1 P2.19 P2.20 P2.21 U1.AD7 U1.AE14 U1.AF16 U1.AG8 | length 71.3
  Top Layer w0.152: U1.AE14@150.62,90.273 U1.AE14@150.62,90.314 151.12,90.814 151.12,91.814 U1.AF16@151.62,92.314 U1.AF16@151.62,92.325 ; v1@152.121,92.826 v1(152.121,92.837) ; U1.AG8@152.62,84.26 U1.AG8@152.62,84.314
  Top Layer w0.356: U1.AE14@150.62,90.273 v1(151.105,89.789) ; U1.AF16@151.62,92.325 v1@152.121,92.826
  Top Layer w0.406: U1.AD7@149.62,83.314 149.62,83.298 v1(150.114,82.804)
  Top Layer w0.457: U1.AG8@152.62,84.26 v1(153.111,83.769)
  Layer 2 w0.356: v1(152.121,92.837) 152.121,91.821 153.06,90.881 153.06,89.002 152.451,88.392 152.451,86.576 152.933,86.093 152.933,85.598 153.111,85.42 v1(153.111,83.769)
  Layer 2 w0.457: v1(150.114,82.804) 150.114,83.261 150.546,83.693 153.035,83.693 v1(153.111,83.769) 153.347,83.769 153.881,83.236 153.924,83.236 158.445,78.715 171.679,78.715 185.09,65.303 189.865,65.303 P2.20@189.89,65.329 ; P2.19@189.89,62.789 P2.20@189.89,65.329 ; P2.21@189.89,67.869 P2.20@189.89,65.329
  Bottom Layer w0.356: v1(151.105,89.789) 151.587,89.306 C87.2@151.587,89.256 ; C88.2@151.613,92.364 151.613,92.414 152.026,92.827 152.111,92.827 v1(152.121,92.837)
  Bottom Layer w0.457: C96.1@149.631,82.321 149.631,82.371 v1@149.992,82.732 ; C95.1@152.578,84.252 152.628,84.252 v1(153.111,83.769)
X1_N: C83.1 X1.4 | length 3.3
  Top Layer w0.152: C83.1@159.555,85.877 159.579,85.877 159.752,85.704 159.752,85.551 159.842,85.462 160.146,85.462 160.645,84.963 160.921,84.963 161.011,85.052 161.011,85.192 X1.4@161.849,86.03
X1_P: C79.1 X1.5 | length 3.3
  Top Layer w0.152: C79.1@159.572,84.633 159.589,84.633 159.763,84.807 159.763,84.966 159.852,85.056 159.978,85.056 160.477,84.557 160.921,84.557 161.011,84.467 161.011,84.328 X1.5@161.849,83.49
X2_N: P3.38 U1.Y29 | length 35.4
  Top Layer w0.152: U1.Y29@145.62,105.314 145.624,105.314 v1(146.126,105.816)
  Layer 2 w0.152: P3.38@133.934,133.985 132.957,133.985 132.867,133.896 132.867,121.026 145.872,108.021 145.872,106.506 145.821,106.455 145.821,106.121 v1(146.126,105.816)
X2_P: P3.40 U1.W29 | length 35.4
  Top Layer w0.152: U1.W29@144.62,105.314 144.62,105.326 v1(145.11,105.816)
  Layer 2 w0.152: P3.40@131.394,133.985 132.372,133.985 132.461,133.896 132.461,120.857 145.466,107.852 145.466,106.675 145.415,106.624 145.415,106.121 v1(145.11,105.816)
X3_N: P3.34 U1.AB28 | length 36.2
  Top Layer w0.152: U1.AB28@147.62,104.314 147.646,104.314 v1(148.133,104.8)
  Layer 2 w0.152: P3.34@139.014,133.985 138.037,133.985 137.947,133.896 137.947,118.542 148.15,108.339 148.15,105.711 147.629,105.189 147.629,104.588 147.718,104.499 147.844,104.499 148.133,104.788 v1(148.133,104.8)
X3_P: P3.36 U1.AA27 | length 36.6
  Top Layer w0.152: U1.AA27@146.62,103.314 146.672,103.314 v1(147.142,103.784)
  Layer 2 w0.152: P3.36@136.474,133.985 137.452,133.985 137.541,133.896 137.541,118.373 147.744,108.171 147.744,105.879 147.222,105.358 147.222,104.42 147.431,104.212 147.431,104.086 147.142,103.797 v1(147.142,103.784)
X4_N: P3.30 U1.AC30 | length 31.5
  Top Layer w0.152: U1.AC30@148.62,106.314 148.62,106.38 v1(149.123,106.883)
  Layer 2 w0.152: P3.30@144.094,133.985 143.117,133.985 143.027,133.896 143.027,115.713 148.811,109.93 148.811,107.055 148.934,106.932 149.075,106.932 v1(149.123,106.883)
X4_P: P3.32 U1.AC29 | length 32.6
  Top Layer w0.152: U1.AC29@148.62,105.314 148.646,105.314 v1(149.123,105.791)
  Layer 2 w0.152: P3.32@141.554,133.985 142.532,133.985 142.621,133.896 142.621,115.545 148.404,109.761 148.404,106.886 149.075,106.216 149.075,105.84 v1(149.123,105.791)
X5_N: P3.26 U1.AF30 | length 30.6
  Top Layer w0.152: U1.AF30@151.62,106.314 151.62,106.357 v1(152.121,106.858)
  Layer 2 w0.152: P3.26@149.174,133.985 148.197,133.985 148.107,133.896 148.107,117.297 150.597,114.808 150.597,108.382 v1(152.121,106.858)
X5_P: P3.28 U1.AE30 | length 30.3
  Top Layer w0.152: U1.AE30@150.62,106.314 150.62,106.373 v1(151.105,106.858)
  Layer 2 w0.152: P3.28@146.634,133.985 147.612,133.985 147.701,133.896 147.701,117.129 150.292,114.538 150.292,107.671 v1(151.105,106.858)
X6_N: P3.22 U1.AJ29 | length 31.9
  Top Layer w0.152: U1.AJ29@154.62,105.314 154.641,105.314 v1(155.118,105.791)
  Layer 2 w0.152: P3.22@154.254,133.985 153.277,133.985 153.187,133.896 153.187,125.201 152.476,124.49 152.476,107.822 154.787,105.512 154.913,105.512 155.002,105.601 155.002,105.607 155.118,105.722 v1(155.118,105.791)
X6_P: P3.24 U1.AJ28 | length 32.6
  Top Layer w0.152: U1.AJ28@154.62,104.314 154.62,104.321 155.118,104.819 v1(155.118,104.826)
  Layer 2 w0.152: P3.24@151.714,133.985 152.692,133.985 152.781,133.896 152.781,125.369 152.07,124.658 152.07,107.654 154.618,105.105 154.913,105.105 155.002,105.016 155.002,105.01 155.118,104.895 v1(155.118,104.826)
X7_N: P3.18 U1.AH26 | length 36.4
  Top Layer w0.152: U1.AH26@153.62,102.314 153.647,102.314 v1(154.127,102.794)
  Layer 2 w0.152: v1(154.127,102.794) 154.176,102.842 154.547,102.842 156.227,104.522 156.227,105.85 155.905,106.172 155.905,107.108 154.356,108.657 154.356,123.992 158.267,127.903 158.267,133.896 158.357,133.985 P3.18@159.334,133.985
X7_P: P3.20 U1.AH27 | length 35.7
  Top Layer w0.152: U1.AH27@153.62,103.314 153.657,103.314 v1(154.127,103.784)
  Layer 2 w0.152: v1(154.127,103.784) 154.458,103.454 154.584,103.454 155.821,104.691 155.821,105.681 155.499,106.004 155.499,106.939 153.949,108.489 153.949,124.16 157.861,128.072 157.861,133.896 157.772,133.985 P3.20@156.794,133.985
X8_N: P3.14 U1.AF27 | length 46.4
  Top Layer w0.152: U1.AF27@151.62,103.314 151.676,103.314 v1(152.146,103.784)
  Layer 2 w0.152: v1(152.146,103.784) 152.146,103.716 152.043,103.613 152.043,103.582 151.954,103.492 151.659,103.492 151.308,103.141 151.308,101.851 151.635,101.524 154.163,101.524 154.823,102.184 159.807,102.184 163.347,105.724 163.347,133.896 163.437,133.985 P3.14@164.414,133.985